# Altium PCB MasterBoardRevB.PcbDoc
Units mil, origin at the board's own origin, x right, y up, seen from the top; angles counter-clockwise.
Board outline 4074 x 3000 mil, 2 copper layers (Top Layer, Bottom Layer); 72 components, 53 nets, 273 pads, 61 vias.
Unrouted connection lines stored in the file: 1.
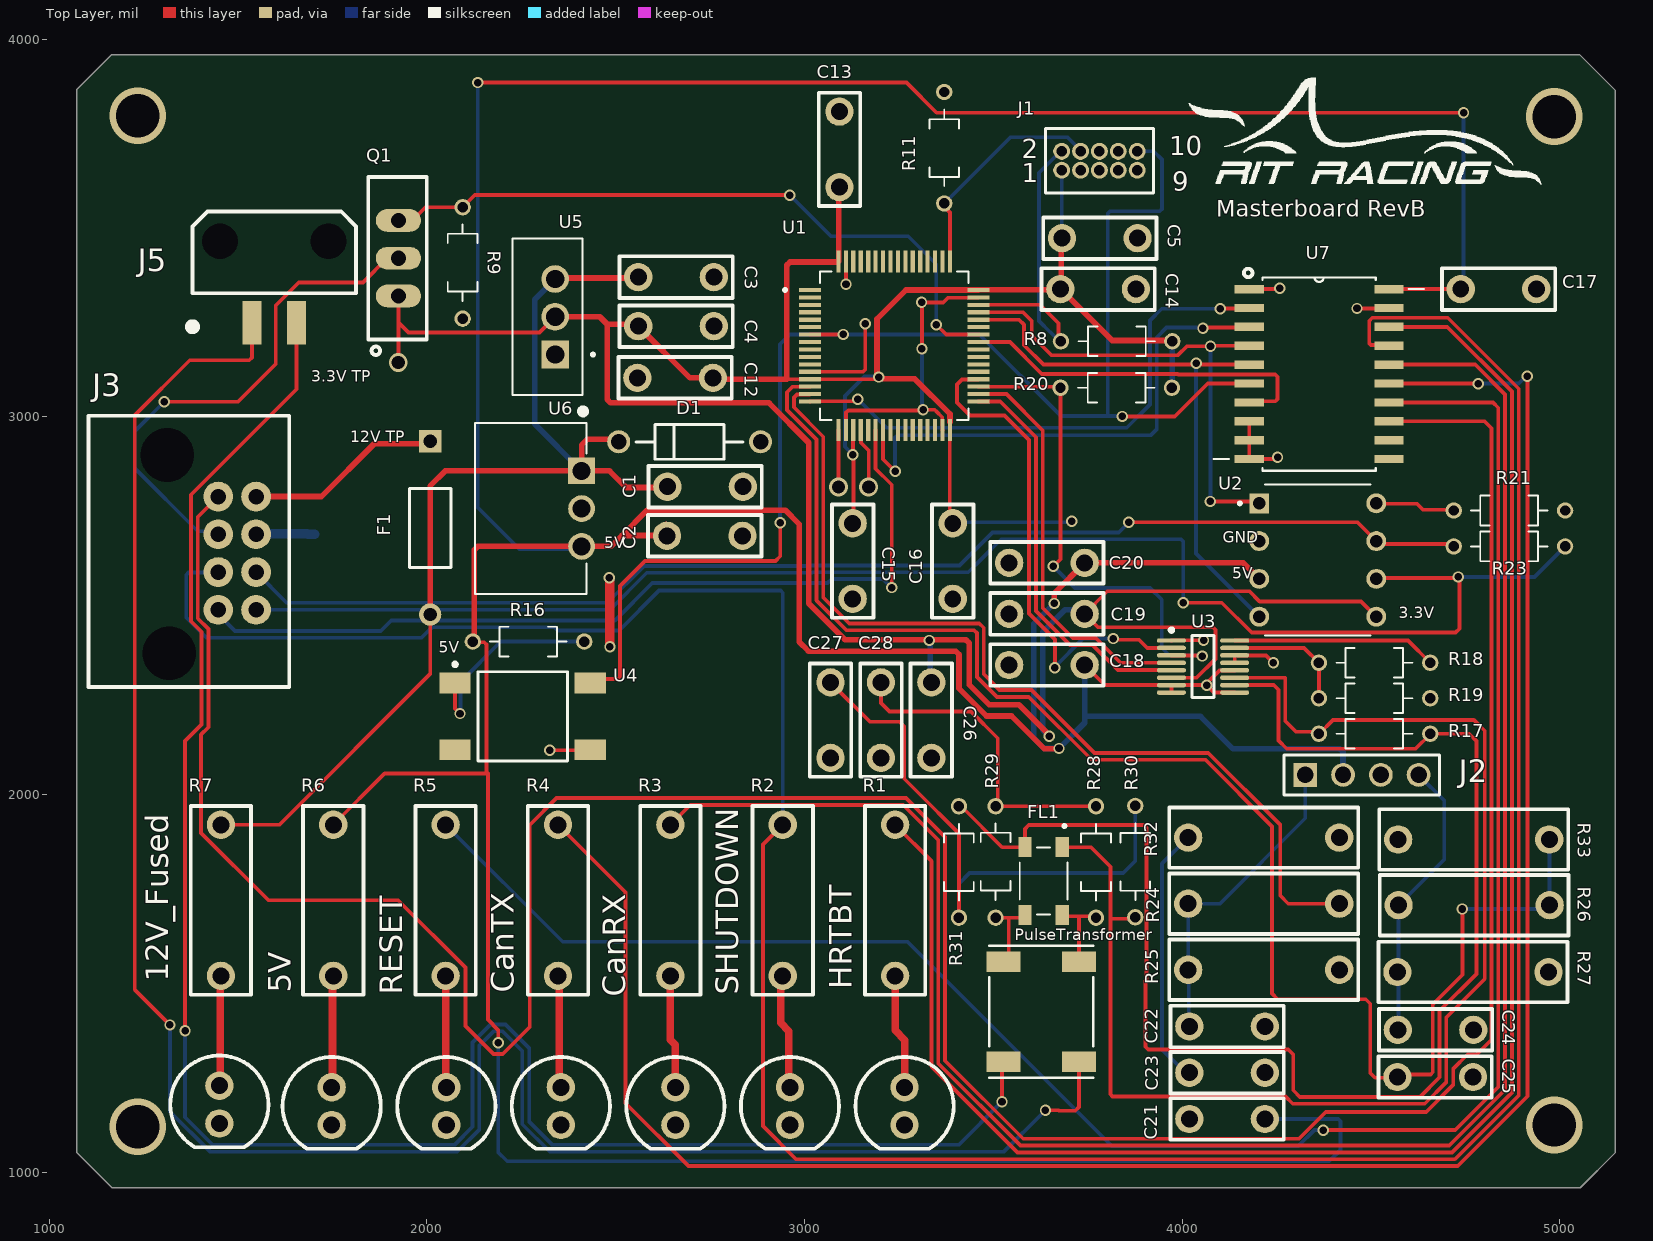
[diagram p0: Top Layer view]
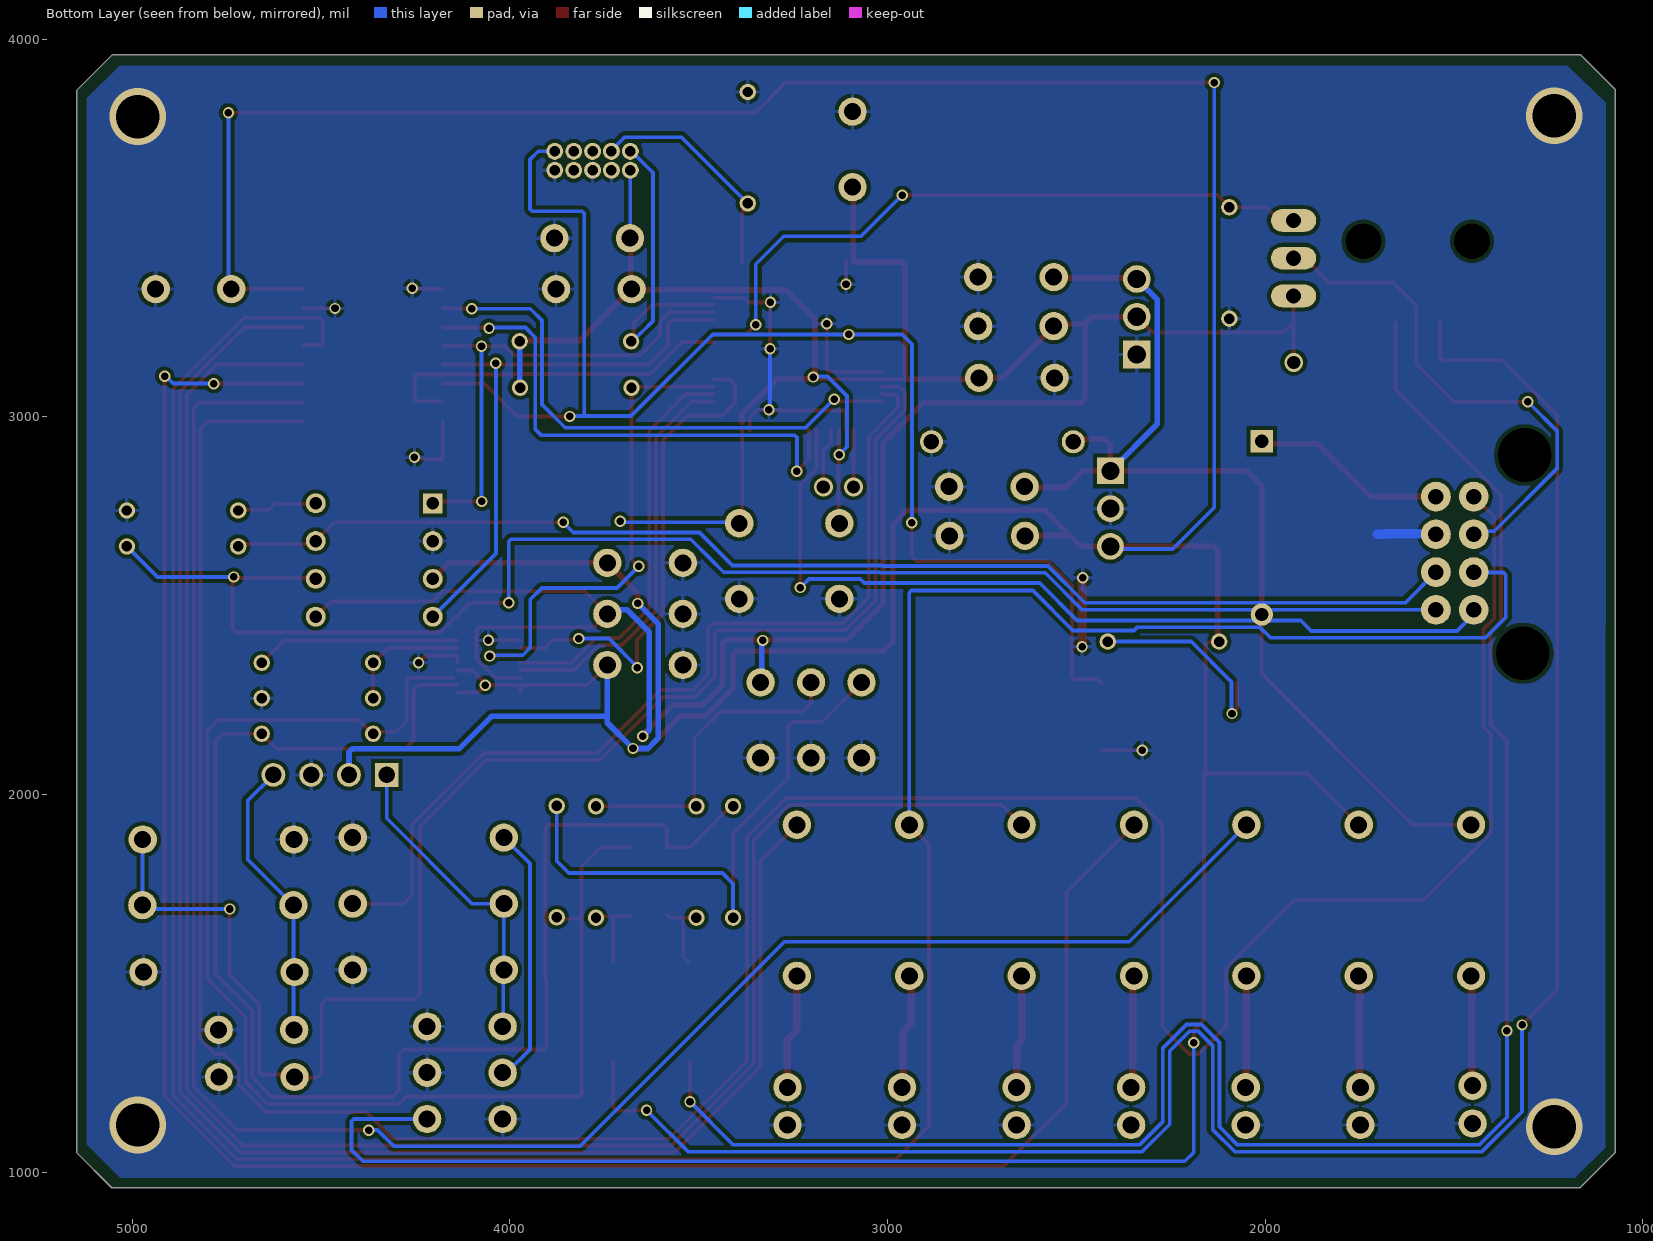
[diagram p1: Bottom Layer view, seen from below]

## Layer stack, top to bottom
Top Solder: solder mask 0.4, Solder Resist, Dk 3.5
Top Layer: signal copper 1.4
Dielectric 1: dielectric 12.6, FR-4, Dk 4.8
Bottom Layer: signal copper 1.4
Bottom Solder: solder mask 0.4, Solder Resist, Dk 3.5

## Board outline
1073,1053 1073,3866 1166,3959 5052,3959 5147,3864 5147,1052 5054,959 1167,959

## Design rules (kind name [scope] priority, off if disabled: settings)
Clearance [All] p1: gap=10 ignorepadtopadclearanceinfootprint=TRUE except(0: Arc-Hole Track-Hole SMDPad-Hole THPad-Hole Via-Hole Fill-Hole Poly-Hole Region-Hole Text-Hole; 8: Arc-Arc Arc-Track Arc-SMDPad Track-Track Track-SMDPad SMDPad-SMDPad)
PolygonConnect [All] p1: connectstyle=Relief reliefconductorwidth=10 reliefentries=4 polygonreliefangle="90 Angle" airgapwidth=10
RoomDefinition CONNECTORS [InComponentClass('CONNECTORS')] p1: confinementstyle=ConfineIn formatcopy=TRUE lockcomponents=FALSE outline 674,2061 4615,2061 4615,3940 674,3940
RoomDefinition POWER [InComponentClass('POWER')] p2: confinementstyle=ConfineIn formatcopy=TRUE lockcomponents=FALSE outline 3221.8,3659.96 3221.8,4102 3447.2,4102 3447.2,3280.86 4012.65,3280.86 4012.65,3142.72 3646.35,3142.72 3221.8,3142.72
RoomDefinition COMMUNICATIONS [InComponentClass('COMMUNICATIONS')] p3: confinementstyle=ConfineIn formatcopy=TRUE lockcomponents=FALSE outline 3477,1845 4844,1845 4844,2803 3477,2803
RoomDefinition PROCESSOR [InComponentClass('PROCESSOR')] p4: confinementstyle=ConfineIn formatcopy=TRUE lockcomponents=FALSE outline 2492.64,3033.23 2492.64,3173.23 2930.79,3173.23 2930.79,3461.22 3022.64,3461.22 3022.64,3873.23 3162.64,3873.23 3162.64,3461.22 3510.63,3461.22 3510.63,3408.23 5002.64,3408.23 5002.64,3268.23 4652.64,3268.23 4652.64,2844.23 3462.64,2844.23 3462.64,2453.23 3057.64,2453.23 3057.64,2915.24 2930.79,2915.24 2930.79,3033.23
RoutingVias [All] p1: holewidth=28 width=50 viastyle="Through Hole" minholewidth=28 minwidth=50 maxholewidth=28 maxwidth=50
SolderMaskExpansion [All] p1: expansion=4 istentingtop=FALSE
Width [All] p1: maxlimit=25 minlimit=8 preferedwidth=10 minimp=50.000000 maximp=50.000000 favimp=50.000000
30 further rules are at their usual default settings.

## Classes and differential pairs
component class CONNECTORS: C5 C21 C22 C23 C24 C25 J1 J2 J3 J5 Q1 R8 R9 R11 R16 R24 R25 R26 R27 R32 R33 U4
component class PROCESSOR: C12 C13 C14 C15 C16 C17 U1 U7
component class POWER: 5V 12V_Fused C1 C2 C3 C4 CanRX CanTX D1 F1 HRTBT R1 R2 R3 R4 R5 R6 R7 RESET SHUTDOWN U5 U6
component class COMMUNICATIONS: C18 C19 C20 C26 C27 C28 FL1 PulseTransformer R17 R18 R19 R20 R21 R23 R28 R29 R30 R31 U2 U3

## Components (designator, comment, footprint, x,y, rotation, side; value= is the part's Value field where it differs from the comment)
5V "Value?" "LED, TH" 1748.33,1175 r270 top
12V_Fused "Value?" "LED, TH" 1451,1179 r270 top
C1 "10uF" "Cap, 5mm TH, Ceramic" 2737,2815 r180 top value=Value?
C2 "10uF" "Cap, 5mm TH, Ceramic" 2736,2685 r180 top value=Value?
C3 "10uF" "Cap, 5mm TH, Ceramic" 2660,3370 r180 top value=Value?
C4 "10uF" "Cap, 5mm TH, Ceramic" 2660,3240 r180 top value=Value?
C5 "500nF" "Cap, 5mm TH, Ceramic" 3782,3473 r180 top value=Value?
C12 "100nF" "Cap, 5mm TH, Ceramic" 2657.64,3103.23 r0 top value=Value?
C13 "100nF" "Cap, 5mm TH, Ceramic" 3092.64,3708.23 r270 top value=Value?
C14 "100nF" "Cap, 5mm TH, Ceramic" 3777.64,3338.23 r180 top value=Value?
C15 "100nF" "Cap, 5mm TH, Ceramic" 3127.64,2618.23 r90 top value=Value?
C16 "100nF" "Cap, 5mm TH, Ceramic" 3392.64,2618.23 r90 top value=Value?
C17 "100nF" "Cap, 5mm TH, Ceramic" 4837.64,3338.23 r180 top value=Value?
C18 "100nF" "Cap, 5mm TH, Ceramic" 3642,2343 r0 top value=Value?
C19 "100nF" "Cap, 5mm TH, Ceramic" 3642,2478.25 r0 top value=Value?
C20 "100nF" "Cap, 5mm TH, Ceramic" 3642,2613.5 r0 top value=Value?
C21 "47uF" "Cap, 5mm TH, Ceramic" 4119,1141 r0 top value=Value?
C22 "47nF" "Cap, 5mm TH, Ceramic" 4119,1386 r180 top value=Value?
C23 "47nF" "Cap, 5mm TH, Ceramic" 4119,1263.5 r180 top value=Value?
C24 "47nF" "Cap, 5mm TH, Ceramic" 4671,1377 r0 top value=Value?
C25 "47nF" "Cap, 5mm TH, Ceramic" 4670,1252 r0 top value=Value?
C26 "100nF" "Cap, 5mm TH, Ceramic" 3336,2197 r90 top value=Value?
C27 "100nF" "Cap, 5mm TH, Ceramic" 3069,2197 r270 top value=Value?
C28 "10nF" "Cap, 5mm TH, Ceramic" 3202.5,2197 r270 top value=Value?
CanRX "Value?" "LED, TH" 2658.33,1175 r270 top
CanTX "Value?" "LED, TH" 2355,1175 r270 top
D1 "MUR180ERLG" ONSC-AXIAL_LEAD-2-59-10_P 2696,2934 r0 top
F1 "Fuse" PIN-W2/E2.8 2009,2706 r270 top
FL1 "ACT45B-220-2P-TL003" FIL_ACT45B-220-2P-TL003 3633,1771 r270 top
HRTBT "Value?" "LED, TH" 3265,1175 r270 top
J1 "SAMTEC-FTSH-105-01-X-D" SAMTEC-FTSH-105-01-X-D 3781,3678 r0 top
J2 "4pin Header" 61300411121 4476,2052 r0 top
J3 "30700-5080" 30700-5080 1498,2639 r90 top
J5 "43650-0209" 43650-0209 1596.3,3465 r180 top
PulseTransformer "PE-68386NLT" PE-68386NL_PUL 3627,1425 r270 top
Q1 "ZVN4424A" TO-220-KCS0003B_40MIL-DRILL 1925,3420 r90 top
R1 "Value?" "Resistor, TH" 3240,1720 r90 top
R2 "Value?" "Resistor, TH" 2942.5,1720 r90 top
R3 "Value?" "Resistor, TH" 2645,1720 r90 top
R4 "Value?" "Resistor, TH" 2347.5,1720 r90 top
R5 "Value?" "Resistor, TH" 2050,1720 r90 top
R6 "Value?" "Resistor, TH" 1752.5,1720 r90 top
R7 "Value?" "Resistor, TH" 1455,1720 r90 top
R8 "100k" "RESAD640W45L370D200 - duplicate" 3824,3200 r0 top value=Value?
R9 "10k" "RESAD640W45L370D200 - duplicate" 2095,3405 r90 top value=Value?
R11 "100k" "RESAD640W45L370D200 - duplicate" 3370,3715 r270 top value=Value?
R16 "160r" "RESAD640W45L370D200 - duplicate" 2272,2405 r180 top value=Value?
R17 "120r" "RESAD640W45L370D200 - duplicate" 4512,2161 r180 top value=Value?
R18 "806r" "RESAD640W45L370D200 - duplicate" 4512,2349 r180 top value=Value?
R19 "1.21k 5%" "RESAD640W45L370D200 - duplicate" 4512,2255 r180 top value=Value?
R20 "2k" "RESAD640W45L370D200 - duplicate" 3823,3077 r0 top value=Value?
R21 "10k" "RESAD640W45L370D200 - duplicate" 4869,2752 r180 top value=Value?
R23 "120r" "RESAD640W45L370D200 - duplicate" 4869,2657 r180 top value=Value?
R24 "160r" "Resistor, TH" 4216,1711 r180 top value=Value?
R25 "12K" "Resistor, TH" 4216,1536 r0 top value=Value?
R26 "160r" "Resistor, TH" 4773,1707 r180 top value=Value?
R27 "12K" "Resistor, TH" 4770,1530 r180 top value=Value?
R28 "300r" "RESAD640W45L370D200 - duplicate" 3772,1824 r270 top value=Value?
R29 "300r" "RESAD640W45L370D200 - duplicate" 3506,1819 r90 top value=Value?
R30 "62r" "RESAD640W45L370D200 - duplicate" 3876,1825 r270 top value=Value?
R31 "62r" "RESAD640W45L370D200 - duplicate" 3409,1824 r270 top value=Value?
R32 "309r" "Resistor, TH" 4216,1886 r0 top value=Value?
R33 "309r" "Resistor, TH" 4772,1881 r0 top value=Value?
RESET "Value?" "LED, TH" 2051.67,1175 r270 top
SHUTDOWN "Value?" "LED, TH" 2961.67,1175 r270 top
U1 "STM32F091RCT6" *QFP50P1200X1200X160-64N 3237.64,3188.23 r0 top
U2 "MCP2562-E/P" DIP787W45P254L1016H533Q8 4359,2621 r0 top
U3 "LTC6820IMS#TRPBF" LT-MS-16_M 4055.34,2338.9 r0 top
U4 "Reset Button" TECO-FSM4JSMA_V 2254,2207 r90 top
U5 "LM1117T-3.3" TO254P1054X470X1955-3 2340,3265 r90 top
U6 "VXO7805-1000" CONV_VXO7805-1000 2410,2857 r270 top
U7 "74ACT541SC" SOIC127P1032X265-20N 4362.64,3113.23 r0 top

## Footprints (in the part's own frame and the unit in brackets; to place one, negate y for a bottom-side part, rotate by r counter-clockwise, add the part's x,y. Pads: shape width x height; smd on the part's side, far side on the other; paste and mask are expansions set on the pad)
30700-5080 [mm]
  round 2 hole 1.04: 1(3.81,-1.27) 2(1.27,-1.27) 3(-1.27,-1.27) 4(-3.81,-1.27) 5(3.81,1.27) 6(1.27,1.27) 7(-1.27,1.27) 8(-3.81,1.27)
  round 0 hole 3.6 unplated: ""(-6.731,4.572)
  round 3 hole 3.6 unplated: ""(6.604,4.699)
  silkscreen extent -9,-3.5 9.25,10, body extent -9.1,-9.96 9.05,8.84, height 22.04
43650-0209 [mm] "Molex 2 Position Board Header, Right Angle"
  rect 1.27x2.92 smd: 1(1.5,5.47) 2(-1.5,5.47)
  round 0 hole 2.41 unplated: ""(-3.65,0) ""(3.65,0)
  silkscreen extent -5.5,-2 5.7,5.95, body extent -4.82,-4.6 4.83,6.14, height 5.64
61300411121 [mm]
  rect 1.6x1.6 hole 1.1: 1(-3.81,0)
  round 1.6 hole 1.1: 2(-1.27,0) 3(1.27,0) 4(3.81,0)
  silkscreen extent -5.23,-1.35 5.23,1.35, body extent -5.08,-1.27 5.08,1.27, height 8.57
*QFP50P1200X1200X160-64N [mm]
  rect 1.47x0.28 smd: 1(-5.67,3.75) 2(-5.67,3.25) 3(-5.67,2.75) 4(-5.67,2.25) 5(-5.67,1.75) 6(-5.67,1.25) 7(-5.67,0.75) 8(-5.67,0.25) 9(-5.67,-0.25) 10(-5.67,-0.75) 11(-5.67,-1.25) 12(-5.67,-1.75) 13(-5.67,-2.25) 14(-5.67,-2.75) 15(-5.67,-3.25) 16(-5.67,-3.75) 33(5.67,-3.75) 34(5.67,-3.25) 35(5.67,-2.75) 36(5.67,-2.25) 37(5.67,-1.75) 38(5.67,-1.25) 39(5.67,-0.75) 40(5.67,-0.25) 41(5.67,0.25) 42(5.67,0.75) 43(5.67,1.25) 44(5.67,1.75) 45(5.67,2.25) 46(5.67,2.75) 47(5.67,3.25) 48(5.67,3.75)
  rect 0.28x1.47 smd: 17(-3.75,-5.67) 18(-3.25,-5.67) 19(-2.75,-5.67) 20(-2.25,-5.67) 21(-1.75,-5.67) 22(-1.25,-5.67) 23(-0.75,-5.67) 24(-0.25,-5.67) 25(0.25,-5.67) 26(0.75,-5.67) 27(1.25,-5.67) 28(1.75,-5.67) 29(2.25,-5.67) 30(2.75,-5.67) 31(3.25,-5.67) 32(3.75,-5.67) 49(3.75,5.67) 50(3.25,5.67) 51(2.75,5.67) 52(2.25,5.67) 53(1.75,5.67) 54(1.25,5.67) 55(0.75,5.67) 56(0.25,5.67) 57(-0.25,5.67) 58(-0.75,5.67) 59(-1.25,5.67) 60(-1.75,5.67) 61(-2.25,5.67) 62(-2.75,5.67) 63(-3.25,5.67) 64(-3.75,5.67)
  silkscreen extent -7.44,-5 5,5, body extent -6,-6 6,6, height 1.56
"Cap, 5mm TH, Ceramic" [mil] "Through Hole Cap, Ceramic"
  round 75 hole 45: 1(-100,0) 2(100,0)
  silkscreen extent -150,-55 150,55, body extent -109,-59 109,59, height 176
CONV_VXO7805-1000 [mm]
  rect 1.8x1.8 hole 1.2: 1(0,0)
  round 1.8 hole 1.2: 2(2.54,0) 3(5.08,0)
  silkscreen extent -4.2,-7.18 8.29,0.32, body extent -3.12,-6.76 8.38,0.32, height 17.5
DIP787W45P254L1016H533Q8 [mil]
  rect 52.68x52.68 hole 32.68: 1(-155,150)
  round 52.68 hole 32.68: 2(-155,50) 3(-155,-50) 4(-155,-150) 5(155,-150) 6(155,-50) 7(155,50) 8(155,150)
  silkscreen extent -210,-200 140,200, body extent -155,-185 155,180, height 218
FIL_ACT45B-220-2P-TL003 [mm]
  rect 1.35x0.9 smd: 1(-2.275,1.25) 2(-2.275,-1.25) 3(2.275,-1.25) 4(2.275,1.25)
  silkscreen extent -3.8,-1.6 2.25,1.6
"LED, TH" [mil] "Through Hole LED"
  round 75 hole 45: 1(-50,0) 2(50,0)
  silkscreen extent -130,-130 113,130, body extent -118,-118 98,118, height 346
LT-MS-16_M [mm]
  oval 1.95x0.3 smd: 1(-2.125,1.75) 2(-2.125,1.25) 3(-2.125,0.75) 4(-2.125,0.25) 5(-2.125,-0.25) 6(-2.125,-0.75) 7(-2.125,-1.25) 8(-2.125,-1.75) 9(2.125,-1.75) 10(2.125,-1.25) 11(2.125,-0.75) 12(2.125,-0.25) 13(2.125,0.25) 14(2.125,0.75) 15(2.125,1.25) 16(2.125,1.75)
  silkscreen extent -2.25,-2.08 0.75,2.57, body extent -1.55,-2.05 1.55,2.05, height 1.1
ONSC-AXIAL_LEAD-2-59-10_P [mm] "AXIAL, 2-Leads, Diameter 2.35mm"
  round 1.55 hole 1.05: 1(-4.77,0) 2(4.77,0)
  silkscreen extent -3.59,-1.17 3.59,1.17
PE-68386NL_PUL [mil]
  rect 55x90 smd: 1(-132.5,100) 2(-132.5,-100) 3(132.5,-100) 4(132.5,100)
  silkscreen extent -175,-138 175,138, body extent 0,0 10,10, height 10
PIN-W2/E2.8 [mm] "Thru-Hole; 2 Leads"
  rect 1.5x1.5 hole 0.9: 1(-5.825,0)
  round 1.5 hole 0.9: 2(5.825,0)
  silkscreen extent -2.65,-1.4 2.65,1.4
"RESAD640W45L370D200 - duplicate" [mm]
  round 1.1 hole 0.7: 1(-3.683,0) 2(3.81,0)
  silkscreen extent -2.5,-1 2.65,1, body extent -3.92,-1.12 3.98,1.03, height 2.17
"Resistor, TH" [mil] "Axial Through Hole Resistor"
  round 75 hole 45: 1(-200,0) 2(200,0)
  silkscreen extent -250,-80 250,80, body extent -211,-51 211,51, height 106
SAMTEC-FTSH-105-01-X-D [mil]
  round 45 hole 27.95: 1(-100,-25) 2(-100,25) 3(-50,-25) 4(-50,25) 5(0,-25) 6(0,25) 7(50,-25) 8(50,25) 9(100,-25) 10(100,25)
  silkscreen extent -143,-85 143,85, body extent -125,-67 125,68, height 219
SOIC127P1032X265-20N [mil]
  rect 78x22 smd: 1(-185,225) 2(-185,175) 3(-185,125) 4(-185,75) 5(-185,25) 6(-185,-25) 7(-185,-75) 8(-185,-125) 9(-185,-175) 10(-185,-225) 11(185,-225) 12(185,-175) 13(185,-125) 14(185,-75) 15(185,-25) 16(185,25) 17(185,75) 18(185,125) 19(185,175) 20(185,225)
  silkscreen extent -279,-256 277,256
TECO-FSM4JSMA_V [mm] "SMD, 4-Leads, Body 6x6mm, Pitch 4.5mm"
  rect 1.4x2.1 smd: 1(2.25,4.55) 2(2.25,-4.55) 3(-2.25,4.55) 4(-2.25,-4.55)
  silkscreen extent -3,-3 3.62,4.67, body extent -3,-5 3,5, height 5.08
TO254P1054X470X1955-3 [mm]
  rect 1.86x1.86 hole 1.24: 1(-2.54,0)
  round 1.86 hole 1.24: 2(0,0) 3(2.54,0)
  silkscreen extent -5.27,-2.64 5.27,2.86
TO-220-KCS0003B_40MIL-DRILL [mil]
  oval 60x120 hole 40: 1(-100,0) 2(0,0) 3(100,0)
  silkscreen extent -256,-75 215,80, body extent -206,-85 200,45, height 749

## Part data
5V 12V_Fused CanRX CanTX HRTBT RESET SHUTDOWN: library part "LED, TH", "LED, 5mm, TH", Published=22Oct2016, Publisher=T.Tallo, Status=Active, TargetLibrary=RITRacing-LED's
C1 C2 C3 C4 C5 C12 C13 C14 C15 C16 C17 C18 C19 C20 C21 C22 C23 C24 C25 C26 C27 C28: library part "Cap, 5MM TH, Ceramic", "Generic Cap, 5MM TH, Ceramic", Published=22Oct2016, Publisher=T.Tallo, Status=Active, TargetLibrary=RITRacing-Passives
D1: library part CMP-0902-00111-1, "SWITCHMODE(TM) Power Rectifier, Ultrafast 'E' Series with High Reverse Energy Capability, 2-Pin Axial_Lead, Pb-Free, Tape and Reel", Manufacturer="On Semiconductor", ComponentLink1Description="Manufacturer URL", ComponentLink1URL=http://www.onsemi.com/, ComponentLink2Description=Datasheet, ComponentLink2URL=http://www.onsemi.cn/pub_link/Collateral/MUR180E-D.PDF, ComponentLink3Description="Package Specification", ComponentLink3URL=http://www.onsemi.cn/pub_link/Collateral/59-10.PDF, DatasheetVersion="Rev. 4", IFSM Max (A)=35, Mounting Technology="Through Hole", PackageDescription="2-Pin, Axial Lead, Diameter 2.35 mm", PackageReference=AXIAL_LEAD-2-59-10, PackageVersion="Rev. U, 02/2005", Packing="Tape and Reel", PartNumber=MUR180ERLG, RoHS=TRUE, Type=Ultrafast
F1: library part "Fuse 2", LatestRevisionDate=17-Jul-2002, LatestRevisionNote="Re-released for DXP Platform.", PackageDescription="Thru-Hole; 2 Leads", PackageReference=PIN-W2/E2.8, Published=8-Jun-2000, Publisher="Altium Limited"
FL1: "100ÂµH @ 100kHz 2 Line Common Mode Choke Surface Mount 5.8 kOhms @ 10MHz 150mA DCR 2Ohm", Package=None, Availability=Unavailable, MP=ACT45B-220-2P-TL003, Price=None
J1: "Connector Header Through Hole 10 position 0.050\" _1.27mm_", Package=None, Availability=Unavailable, MF=Samtec, MP=FTSH-105-01-F-D, Price=None, SnapEDA_Link=https://www.snapeda.com/parts/FTSH-105-01-F-D/Samtec%20Inc./view-part/105348/?ref=snap
J2: library part CMP-1502-01064-1, "THT Vertical Pin Header WR-PHD, Pitch 2.54 mm, Single Row, 4 pins", Contact Resistance=20mOhm, Manufacturer="Wurth Elektronik", Manufacturer Part Number=61300411121, Operating Temperature=-40to105degC, Rated Current=3A, Withstanding Voltage=500VAC, Working Voltage=250VAC, Datasheet URL=https://katalog.we-online.de/em/datasheet/6130xx11121.pdf, Gender=Male, Manufacturer URL=http://www.we-online.de, Mounting Technology=THT, Orientation=Vertical, Package Reference=61300411121, Packaging=Bag, Part Number=61300411121, Pin Number=4, Pitch=2.54mm, Publisher=WurthElektronik, Row Number=Single
J3: "Molex 8 Position High Density Board Header", Manufacturer=Molex, ComponentLink1Description=Datasheet, ComponentLink1URL=http://www.molex.com/molex/products/datasheet.jsp?part=active/0307004081_PCB_HEADERS.xml, PartNumber=30700-5080, Published=22Oct2016, Publisher=T.Tallo, Status=Active, TargetLibrary=RITRacing-Connectors
J5: "M3", Manufacturer=Molex, Voltage=600V, ComponentLink1Description=Datasheet, ComponentLink1URL=http://www.mouser.com/ds/2/418/NG_CD_1445088_A1-614413.pdf, PartNumber=43650-0209, Published=13Aug2018, Publisher=T.Tallo, Status=Active, TargetLibrary=RITRacing-Connectors
PulseTransformer: "No Description Available", Built_By=EMA_Cory, Copyright="Copyright (C) 2018 Accelerated Designs. All rights reserved", Manufacturer_Part_Number=PE-68386NLT, RefDes=RefDes, SourceLibrary=Pulse_Electronics_2019-12-18, Type=DEV, Vendor="Pulse Electronics Corporation"
Q1: "N-Channel MOSFET, 240V, 260mA", Manufacturer="Diodes Inc", ComponentLink1Description=Datasheet, ComponentLink1URL=https://www.diodes.com/assets/Datasheets/ZVN4424A.pdf, PartNumber=ZVN4424A, Published=09/27/2017, Publisher=T.Tallo, Status=Active, TargetLibrary=RITRacing-Transistors
R1 R2 R3 R4 R5 R6 R7 R8 R9 R11 R16 R17 R18 R19 R20 R21 R23 R24 R25 R26 R27 R28 R29 R30 R31 R32 R33: library part "Resistor, TH", "Generic TH Resistor", Published=22Oct2016, Publisher=T.Tallo, Status=Active, TargetLibrary=RITRacing-Passives
U1: library part CMP-12105-000069-1, "IC MCU 32BIT 256KB FLASH 64LQFP", Ambient Temperature Range High=+85°C, Ambient Temperature Range Low=-40°C, Frequency=48MHz, Manufacturer=STMicroelectronics, Max Junction Temp=+105°C, Max Supply Voltage=3.6V, Min Supply Voltage=2V, Nominal Supply Current=0.9-26.9mA, Package=LQFP64-5W, Temperature="-40°C to +85°C", Automotive=No, Category=IC, ComponentLink2Description=Datasheet, ComponentLink2URL=https://www.st.com/resource/en/datasheet/stm32f091rc.pdf, Core Architecture="ARM Cortex-M0", Data Bus Width=32bits, Device Class L1="Integrated Circuits (ICs)", Device Class L2="Embedded Processors and Controllers", Device Class L3=Microcontrollers, Digikey Description="IC MCU 32BIT 256KB FLASH 64LQFP", Height=1.6mm, Interface=I2C,SPI,USART,CAN,LIN,IrDA,I2S,SMBus, Ipc Land Pattern Name=QFP50P1200X1200X160-64, Lead Free=Yes, Manufacturer Part Number=STM32F091RCT6, Memory Size=256KBytes, Memory Type=FLASH, Mouser Description="ARM Microcontrollers - MCU 16/32-BITS MICROS", Number Of A/D Converters=1, Number Of Adc Channels=19, Number Of Cores=1, Number Of I2C Channels=2, Number Of I/Os=52, Number Of Pwm Channels=6, Number Of Spi Channels=2, Number Of Timers/Counters=10, Number Of Uart Channels=8, Octopart=https://octopart.com/stm32f091rct6-stmicroelectronics-51988683, Ram Size=32KBytes, RoHS=TRUE, Standoff Height=0.05mm, Temperature Range High=+85°C, Temperature Range Low=-40°C
U2: "1/1 Transceiver Half CANbus 8-PDIP", Package="DIP-8 Microchip", Digi-Key_Part_Number=MCP2562-E/P-ND, DigiKey-Purchase-URL=https://snapeda.com/shop?store=DigiKey&id=290285, MF=Microchip, MP=MCP2562-E/P, SnapEDA_Link=https://www.snapeda.com/parts/MCP2562-E/P/Microchip/view-part/290285/?ref=snap
U3: library part CMP-0937-00011-1, "IsoSPI Isolated Communication Interface, 2.7 to 5.5 V, -40 to 85 degC, 16-Pin MSOP (MS), Pb-Free, Tape and Reel", IO Supply Current="1 uA Max.", IO Supply Voltage Range="1.7 to 5.5 V", Manufacturer="Linear Technology", Power Supply="2.7 to 5.5 V", Receiver Input Resistance="35 kOhm", Supply Current, IDLE State="2 uA", Temperature Range (degC)="-40 to 85", ComponentLink1Description="Manufacturer URL", ComponentLink1URL=http://www.linear.com/, ComponentLink2Description=Datasheet, ComponentLink2URL=http://cds.linear.com/docs/en/datasheet/6820fa.pdf, ComponentLink3Description="Package Specification", ComponentLink3URL=http://cds.linear.com/docs/en/packaging/05081669_A_MS16.pdf, DatasheetVersion="Rev. A", Manufacturer Part Number=LTC6820IMS#TRPBF, Mounting Technology="Surface Mount", PackageDescription="16-Pin Micro Small Outline Package, Body 4.039 x 3 mm, Pitch 0.5 mm", PackageReference=MS-16, PackageVersion="Rev. A", Packing="Tape and Reel", PartNumber=LTC6820IMS#TRPBF, VBIAS="1.9 to 2.1 V"
U4: library part CMP-2000-07488-1, "Swicth, SPST, 24 V, -35 to 85 degC, 4-Pin SMD, RoHS, Tape and Reel", Case\/Package=SMD/SMT, Contact Current Rating=50mA, Contact Resistance=100mOhm, Manufacturer="TE Connectivity", Max Operating Temperature=85degC, Max Voltage Rating (DC)=12V, Min Operating Temperature=-35degC, Operating Force=1.57N, Package Description="4-Pin Surface Mount Device, Body 6 x 6 mm, Pitch 4.5 mm", Package Quantity=750, Package Reference=FSM4JSMA, Voltage Rating=24V, Actuator Length=0.055inch, Actuator Material=Polyamide, Contact Material=CopperAlloy, Contact Plating=Silver, Current Rating=50mA, Datasheet URL=http://www.te.com/commerce/DocumentDelivery/DDEController?Action=showdoc&DocId=Customer+Drawing%7F2-1437565-7%7FV%7Fpdf%7FEnglish%7FENG_CD_2-1437565-7_V.pdf%7F4-1437565-2, Datasheet Version="Rev. V, 02/2015", Electrical Life=100000Cycles, Illumination Type=Illuminated, Length=6mm, Manufacturer URL=http://www.te.com/, Mechanical Life=100000Cycles, Mount=SurfaceMount, Mounting Technology=SurfaceMount, Orientation=Straight, Packaging=LoosePiece, REACH SVHC=Unknown, RoHSCompliant=true, Switch Travel=0.25mm, Termination=GullWing, Throw Configuration=SPST, Voltage Rating (DC)=24V, Width=6mm
U5: "800-mA 15-V linear voltage regulator 3-TO-220 0 to 125", Package="TO-220-3 Texas Instruments", Arrow_Electronics-Purchase-URL=https://snapeda.com/shop?store=Arrow+Electronics&id=22275, Availability=https://www.mouser.com/ProductDetail/Texas-Instruments/LM1117T-33-NOPB?qs=X1J7HmVL2ZF7RIQB6O0mNg%3D%3D&gclid=Cj0KCQjwvvj5BRDkARIsAGD9vlJnD1MNOYBTPv7FHDAskkwDQ_PuLBSV-edvQAne3qvGjGEuZX3qJSwaAtIgEALw_wcB, DigiKey-Purchase-URL=https://snapeda.com/shop?store=DigiKey&id=22275, MF="Texas Instruments", Mouser-Purchase-URL=https://snapeda.com/shop?store=Mouser&id=22275, MP=LM1117T-3.3/NOPB, Price=None, SnapEDA_Link=https://www.snapeda.com/parts/LM1117T-3.3/NOPB/Texas%20Instruments/view-part/22275/?ref=snap, Texas_Instruments-Purchase-URL=https://snapeda.com/shop?store=Texas+Instruments&id=22275
U7: "Buffer, Non-Inverting 1 Element 8 Bit per Element 3-State Output 20-SOIC", Package="SOIC-20 Fairchild Semiconductor", Arrow_Electronics-Purchase-URL=https://snapeda.com/shop?store=Arrow+Electronics&id=431052, Availability=Warning, DigiKey-Purchase-URL=https://snapeda.com/shop?store=DigiKey&id=431052, MF="ON Semiconductor", Mouser-Purchase-URL=https://snapeda.com/shop?store=Mouser&id=431052, MP=74ACT541SC, Price=None, SnapEDA_Link=https://www.snapeda.com/parts/74ACT541SC/ON%20Semiconductor/view-part/431052/?ref=snap

## Via types
v1: diameter 30, hole 20, Top Layer to Bottom Layer, 54 vias
v2: diameter 150, hole 115, Top Layer to Bottom Layer, 4 vias
v3: diameter 50, hole 35, Top Layer to Bottom Layer, 3 vias

## Nets (pads, with @x,y where several pads share a name; then routed paths per layer and width w, separated by ;. In a path a pad name is that pad's centre, name@x,y a point inside that pad or via, vN(x,y) a via of type N, cw(c..) or ccw(c..) an arc to the next point about the centre after c; other vN are vias at no path point)
12V_Fused: C1.2 C3.2 D1.1 F1.2 R7.2 U5.3 U6.1 | length 2860.5
  Top Layer w10: R7.2 1610,1920 2009,2319 F1.2
  Top Layer w15: F1.2 2009,2817 2049,2857 U6.1 ; U5.3 2342.5,3367.5 2557.5,3367.5 C3.2 ; D1.1 2501.2,2941 2426,2941 2410,2925 U6.1 ; C1.2 2635,2813 2528,2813 2484,2857 U6.1
  Bottom Layer w15: U5.3 2285.89,3310.89 2285.89,2981.11 U6.1
AIR_Open_Sig: J3.6 Q1.2 | length 1370.2
  Top Layer w10: v1(1305,3040) 1500,3040 1600,3140 1600,3295.16 1660.86,3356.02 1831.02,3356.02 1895,3420 Q1.2
  Bottom Layer w10: v1(1305,3040) 1227.13,2962.13 1227.13,2863.43 1393.63,2696.94 1440.06,2696.94 J3.6
AIRS_Signal_NMOS: Q1.3 R9.2 U1.42 | length 1810.3
  Top Layer w10: Q1.3 1961.39,3520 1996.39,3555 R9.2 2127,3587 v1(2961,3587) ; v1(3349,3244) 3375.24,3217.76 U1.42
  Bottom Layer w10: v1(2961,3587) 3070,3478 3275,3478 3349,3404 v1(3349,3244)
CANH: J3.3 R23.2 U2.7 | length 3319.3
  Top Layer w10: v1(3859,2721) 4464,2721 4521.63,2663.37 4712.63,2663.37 R23.2
  Bottom Layer w10: J3.3 1629,2508 2478,2508 2575,2605 3012.82,2605 3014.54,2606.73 3410.73,2606.73 3498,2694 3832,2694 v1(3859,2721)
CANL: J3.4 R23.1 U2.6 | length 4140.9
  Top Layer w10: v1(4003,2508) 4105,2508 4184.34,2428.66 4723.66,2428.66 4734,2439 4734,2573.14 4728.14,2579 4722.18,2573.04 U2.6@4518.04,2573.04 ; U2.6@4511,2570 U2.6@4514.04,2573.04
  Bottom Layer w10: J3.4 2484.46,2489 2582.46,2587 3020.27,2587 3022,2588.73 3382.23,2588.73 3433.73,2588.73 3470.14,2625.14 3521,2676 3997.14,2676 4003,2670.14 v1(4003,2508) ; v1(4731.07,2576.07) 4933.07,2576.07 R23.1
CanRx: U1.45 U2.1 U7.4 | length 1340
  Top Layer w10: U1.45 3461.06,3277 3578.39,3277 3601.85,3253.54 3601.85,3215 3653.5,3163.35 3989.18,3163.35 4012.84,3187 4066.41,3187 4067.64,3188.23 U7.4 ; v1@4077,2779 4080,2776 4199,2776 U2.1@4205,2770
  Bottom Layer w10: v1(4074,2776) 4075,2777 v1(4075,3187)
CanRx_FromBuff: R3.2 U7.16 | length 5194.5
  Top Layer w10: R3.2 2697.5,1972.5 3261.75,1972.5 3354.35,1879.9 3354.35,1287.77 3571.62,1070.5 4707.13,1070.5 4855,1218.37 4855,3059.43 4776.2,3138.23 U7.16
CanTx: U1.44 U2.4 U7.5 | length 1541.4
  Top Layer w10: U1.44 3568.17,3257.13 3581.2,3244.1 3581.2,3189.7 3632.67,3138.23 4033,3138.23 v1(4037,3142.23) ; v1@4037,3138.23 U7.5
  Bottom Layer w10: v1(4037,3142.23) 4037,2638 U2.4@4205,2470
CanTx_FromBuff: R4.2 U7.15 | length 5625.8
  Top Layer w10: R4.2 2526.26,1741.24 2526.26,1182.82 2692.59,1016.5 4729.5,1016.5 4914,1201 v1(4914,3107.82) ; U7.15 4783.77,3088.23 v1(4784,3088)
  Bottom Layer w10: v1(4784,3088) 4891.4,3088 4911.22,3107.82 v1(4914,3107.82)
CHANNEL1: C25.1 R26.1 R33.2 U1.14 | length 4120.1
  Top Layer w10: U1.14 2969,3079.96 2953.99,3064.95 2953.99,3018 3032,2939.99 3032,2514.16 3111.16,2435 3449.14,2435 3456.5,2427.64 3456.5,2311.5 3509.5,2258.5 3594.04,2258.5 3760.54,2092 4061.54,2092 4238,1915.54 4238,1473 4253,1458 4486,1458 4498,1446 4498,1263 4511,1250 4568,1250 C25.1 4576.73,1258.73 4657.41,1258.73 4663.27,1264.59 4663.27,1444.27 4742,1523 v1(4742,1697)
  Bottom Layer w10: C25.1@4580,1244 C25.1@4580,1244.41 ; v1(4742,1697) 4963,1697 R26.1 4972.5,1707.5 4972.5,1880.5 R33.2
CHANNEL2: C23.2 R24.1 R32.1 U1.15 | length 3178.1
  Top Layer w10: U1.15 3013.24,3059.1 2980.09,3059.1 2971.99,3051.01 2971.99,3025.45 3050,2947.45 3050,2521.62 3118.62,2453 3463,2453 3474.5,2441.5 3474.5,2318.96 3516.46,2277 3601,2277 3768,2110 4069,2110 4260,1919 4260,1732 4281,1711 R24.1
  Bottom Layer w10: R32.1 3947,1817 3947,1325 4008.5,1263.5 C23.2
ChargeSignal_FromBuff: J3.5 U7.13 | length 8028.9
  Top Layer w10: J3.5 1393.63,2734.63 1393.63,2466.48 1421.87,2438.24 1421.87,2177.93 1402.5,2158.57 1402.5,1898.25 1580.75,1720 1924.25,1720 2102.5,1541.75 2102.5,1387.07 2176.57,1313 2201.43,1313 2272.59,1384.16 2272.59,1919.34 2343.75,1990.5 3269.2,1990.5 3372.35,1887.36 3372.35,1295.23 3579.07,1088.5 4309.07,1088.5 4380.35,1159.77 4646.23,1159.77 4717.5,1231.04 4717.5,1273.75 4756,1312.25 4780.5,1312.25 4819,1350.75 4819,2969.95 4800.72,2988.23 U7.13
ChargeSignalCMD: U1.41 U7.7 | length 967.7
  Top Layer w10: U1.41 3460.94,3198 3543.87,3198 3628.22,3113.65 3988.18,3113.65 3990.04,3111.8 4132.82,3111.8 4133.25,3112.23 4246.35,3112.23 4252.64,3105.94 4252.64,3047.19 4246.78,3041.33 4180.74,3041.33 U7.7
Charging: J3.8 U1.22 | length 2314.3
  Top Layer w10: U1.22 3188.43,2862.57 3231,2820 v1(3231,2548)
  Bottom Layer w10: J3.8 1448,2477 1492,2433 1878,2433 1906,2461 2498,2461 2597,2560 3061.33,2560 3072.06,2570.73 3208.27,2570.73 v1(3231,2548)
GND: 5V.2 12V_Fused.2 C1.1 C2.1 C3.1 C4.1 C5.1 C12.1 C13.1 C14.1 C15.1 C16.1 C17.1 C18.1 C19.1 C20.1 C21.1 C22.1 C23.1 C24.2 C25.2 C26.1 C27.2 C28.2 CanRX.2 CanTX.2 D1.2 HRTBT.2 J1.3 J1.5 J1.9 J2.3 J3.2 R9.1 R11.1 R19.1 R21.1 R25.2 R27.1 R32.2 R33.1 RESET.2 SHUTDOWN.2 U1.12 U1.18 U1.31 U1.47 U1.63 U2.2 U3.1 U3.13 U3.14 U4.4 U5.1 U6.2 U7.1 U7.8 U7.9 U7.10 U7.19 | length 2159.4
  Top Layer w10: v1(2326,2117) 2431.72,2117 U4.4 ; U1.12 3155.14,3119.33 3161,3125.19 v1(3161,3246.73) ; U1.18 3110.2,2965.51 3110.2,3011.14 3116.05,3017 3312,3017 v1(3314,3019) 3344.74,3019 3349.74,3014 3364.75,2998.99 3364.75,2982.85 3365.08,2982.52 3365.08,2965.51 U1.31 ; U1.63 3110.2,3410.94 3110.2,3351.2 v1(3110,3351) ; v1(3311,3180) 3311,3302 v1(3310,3303) 3367.63,3303 3380,3315.37 U1.47@3460.05,3315.37 ; U3.1 3972.62,2408.74 v1(4056.68,2408.74) 4040.68,2408.74 ; U3.13 U3.14 4221.99,2368.43 v1(4241.68,2348.74) ; U7.8 U7.9 U7.10 4247.64,2888.23 v1(4252.64,2893.23) ; U7.1 4256.23,3338.23 v1(4258.11,3340.11) ; v1(4463,3287) 4546.41,3287 U7.19
  Top Layer w25: v1(2483,2574) 2483,2572.65 2485,2570.65 v1(2485,2391)
  Bottom Layer w10: v1(3311,3180) 3311,3019.23 v1@3319,3011.23
  Bottom Layer w25: J3.2 1548,2684 1555,2691 1683,2691 1685,2689 1703,2689
  other v2: 1235,1120 4985,1125 4985,3795 1235,3797
HEARTBEAT: R1.2 U7.18 | length 4628.5
  Top Layer w10: R1.2 3336.35,1823.65 3336.35,1280.32 3564.16,1052.5 4714.59,1052.5 4873,1210.91 4873,3066.88 4701.65,3238.23 U7.18
HEARTBEAT_BUFF: U1.16 U7.2 | length 1459.1
  Top Layer w10: U1.16 3014.92,3041.1 3135.1,3041.1 v1(3141,3047) ; v1(4101,3286) 4102.11,3287.11 4176.52,3287.11 U7.2
  Bottom Layer w10: v1(3141,3047) 3217,2971 3853.43,2971 3915,3032.57 3915,3255 3946,3286 v1(4101,3286)
IM: FL1.2 R17.1 R31.1 U3.10 | length 3826.9
  Top Layer w10: R31.1@3415,1969 3523.43,1860.57 FL1.2 3583.79,1908.79 3594,1919 3899.8,1919 3905.65,1913.14 3905.65,1508.92 3903,1506.26 3903,1332.45 3910.45,1325 4281,1325 4294,1312 4294,1217 4311.5,1199.5 4629.5,1199.5 4681.5,1251.5 4681.5,1427.5 4779,1525 4779,2142 4760,2161 4658,2161 4618,2121 4277,2121 4255,2143 4255,2277.29 4242.61,2289.69 U3.10
IM_Out_Connector: J5.2 PulseTransformer.3 | length 5105.6
  Top Layer w10: v1(1360,1375) 1360,2141.52 1403.87,2185.39 1403.87,2430.79 1375.63,2459.02 1375.63,2793.52 1655.35,3073.25 J5.2 ; v1(3523,1187) 3523,1288.5 PulseTransformer.3
  Bottom Layer w10: v1(1360,1375) 1360,1145.75 1433.25,1072.5 2073.41,1072.5 2121.27,1120.35 2121.27,1343.15 2169.12,1391 2208.88,1391 2271.07,1328.81 2271.07,1134.69 2333.25,1072.5 3408.5,1072.5 v1(3523,1187)
IP: FL1.1 R17.2 R30.2 U3.11 | length 3516.2
  Top Layer w10: FL1.1 3758.43,1860.57 3810,1809 3810,1671 ; R30.2@3869,1675 3865,1671 3810,1671 ; U3.11@4148.7,2309.37 4273,2309.37 4273,2195 4302,2166 4358,2166 4363,2161 4399.65,2197.65 4772.35,2197.65 4801,2169 4801,1512 4699.5,1410.5 4699.5,1238.5 4642.5,1181.5 4293.04,1181.5 4274,1200.54 3815.86,1200.54 3810,1206.4 3810,1671
IP_Out_Connector: J5.1 PulseTransformer.4 | length 5475.7
  Top Layer w10: v1(1320,1390) 1227.13,1482.87 1227.13,3004.56 1372.57,3150 1530,3150 1537.24,3157.24 J5.1 ; v1(3638,1164) 3672.71,1164 3673.71,1163 3717,1163 3727,1173 PulseTransformer.4
  Bottom Layer w10: v1(1320,1390) 1320,1160.3 1425.8,1054.5 2080.87,1054.5 2139.27,1112.9 2139.27,1335.69 2176.57,1373 2201.43,1373 2253.07,1321.36 2253.07,1127.23 2325.8,1054.5 3528.5,1054.5 3633,1159 v1@3639,1159
MISO: R20.1 U1.35 U3.3 | length 1343.3
  Top Layer w10: U1.35 3669.37,3079.96 R20.1@3672.64,3083.23 ; v1(3659,2604) 3678,2623 R20.1 ; U3.3 3972.28,2367.82 4052.18,2367.82 v1(4053.3,2366.7)
  Bottom Layer w10: v1(3659,2604) 3716,2547 3915,2547 3946,2516 3946,2389 3966,2369 4051,2369 v1(4053.3,2366.7)
Net5V_1: 5V.1 R6.1 | length 296.7
  Top Layer w10: 5V.1 5V.1@1750.42,1227.08 ; R6.1@1750.42,1517.92 R6.1
  Top Layer w20: 5V.1@1750.42,1227.08 R6.1@1750.42,1517.92
Net12V_Fused_1: 12V_Fused.1 R7.1 | length 295.1
  Top Layer w10: R7.1@1450,1515 R7.1
  Top Layer w20: R7.1@1450,1515 1453,1512 1453,1231 12V_Fused.1
NetC22_2: C22.2 J2.1 R24.2 R25.1 | length 844.9
  Bottom Layer w10: C22.2 4017.5,1387.5 4017.5,1534.5 R25.1 R24.2 4100,1711 4326,1937 J2.1
NetC24_1: C24.1 J2.4 R26.2 R27.2 | length 767.3
  Bottom Layer w10: C24.1@4573,1363 R26.2 4694,1828 4694,1984 J2.4
NetC27_1: C27.1 R30.1 R31.2 | length 1537.4
  Top Layer w10: C27.1 3173,2193 3251,2193 3264,2180 3264,2041.91 3297.41,2008.5 3409,1896.91 R31.2
  Bottom Layer w10: R31.2 3409,1764 3437,1792 3844,1792 3876,1824 R30.1
NetC28_1: C28.1 R28.1 R29.2 | length 851.2
  Top Layer w10: C28.1 3202.5,2242.5 3225,2220 3441.01,2220 3512,2149.01 3512,1975 R29.2 R28.1
NetCanRX_1: CanRX.1 R3.1 | length 301
  Top Layer w20: R3.1 2644.4,1519.4 2644.4,1350.85 2658.33,1336.92 CanRX.1
NetCanTX_1: CanTX.1 R4.1 | length 298.1
  Top Layer w10: R4.1 R4.1@2351.25,1516.25 ; CanTX.1@2351.25,1228.75 CanTX.1
  Top Layer w20: CanTX.1@2351.25,1228.75 R4.1@2351.25,1516.25
NetF1_1: F1.1 J3.1 | length 521.6
  Top Layer w15: J3.1 1721,2789 1860.85,2928.85 2002.52,2928.85 F1.1
NetFL1_3: FL1.3 PulseTransformer.2 R29.1 | length 203.2
  Top Layer w10: R29.1 3541.18,1674 ; PulseTransformer.2 3541.18,1571.68 3541.18,1674 ; FL1.3 3576.35,1674 3541.18,1674
NetFL1_4: FL1.4 PulseTransformer.1 R28.2 | length 217.2
  Top Layer w10: FL1.4@3677,1678 3706,1678 3711,1678 3727,1678 ; PulseTransformer.1 3727,1678 ; R28.2 3768,1678 3727,1678
NetHRTBT_1: HRTBT.1 R1.1 | length 305.9
  Top Layer w20: R1.1 3240,1375.35 3265.6,1349.75 3265.6,1225.6 HRTBT.1
NetR2_1: R2.1 SHUTDOWN.1 | length 292.3
  Top Layer w20: R2.1@2942.5,1505.12 2937.38,1500 2937.38,1395.22 2959,1373.6 2959,1227.67 SHUTDOWN.1
NetR5_1: R5.1 RESET.1 | length 295.7
  Top Layer w10: R5.1 R5.1@2050.83,1519.17 ; RESET.1@2050.83,1225.83 RESET.1
  Top Layer w20: RESET.1@2050.83,1225.83 R5.1@2050.83,1519.17
NetR16_1: R16.1 U4.1 | length 554.7
  Top Layer w10: U4.1 2074.87,2227.55 v1(2088,2214.41) v1@2088,2209
  Bottom Layer w10: v1@2089,2207.61 2089,2298 2196,2405 R16.1
NetR18_1: R18.1 U3.16 | length 542.4
  Top Layer w10: U3.16 4598.2,2407.8 R18.1
NetR18_2: R18.2 R19.2 U3.15 | length 333.2
  Top Layer w10: U3.15 4322.89,2388.11 R18.2 R19.2
NetR21_2: R21.2 U2.8 | length 211.5
  Top Layer w10: U2.8@4515,2770 4622,2770 4638,2754 4712.49,2754 4714.49,2752 R21.2
NetU1_17: U1.17 | length 164.4
  Top Layer w10: v3@3089,2828 3090,2827 v3(3090,2814.5) U1.17
NetU1_20: U1.20 | length 154.7
  Top Layer w10: U1.20 3149.57,2964.49 3149.57,2931.34 3170,2910.91 v3@3170,2819
  other v3: 3170,2814.5
NetU1_33: U1.33 U3.5 | length 1074.7
  Top Layer w10: U1.33 3518.41,3040.59 3613,2946 3613,2486.12 3702.87,2396.25 3763,2396.25 3829.84,2329.4 U3.5@3971.61,2329.4
NetU1_34: U1.34 U3.4 | length 1083.4
  Top Layer w10: U1.34 3534.72,3060.28 3631,2964 3631,2493.57 3710.32,2414.25 3771.32,2414.25 3836.49,2349.09 U3.4@3974.15,2349.09
NetU1_36: U1.36 U3.2 | length 1325.6
  Top Layer w10: U1.36 3460.35,3099.13 3417.13,3099.13 3404,3086 3404,3038 3438.5,3003.5 3530.04,3003.5 3594.5,2939.04 3594.5,2479.16 3663,2410.66 v1(3663,2336) ; v1(3817.68,2413) 3818.42,2413 3821.5,2409.91 3885.93,2409.91 3907.73,2388.11 U3.2
  Bottom Layer w10: v1(3663,2336) 3663,2338.25 3737.75,2413 v1(3817.68,2413)
RESET: J1.10 U1.7 U4.2 U7.6 | length 3702.1
  Top Layer w10: U4.2 2443.55,2306 2497.81,2306 2506.12,2306 2512,2311.88 2512,2552 2578,2618 2923,2618 2936,2631 v1(2936,2720) ; U1.7 3102.17,3217.76 v1(3102.64,3218.23) ; v1(3841,3001) 3980.41,3001 4067.64,3088.23 U7.6
  Bottom Layer w10: v1@2935,2720 2935,3192 2961.23,3218.23 v1(3102.64,3218.23) 3462.64,3218.23 3678.87,3002 3802.85,3002 ; v1(3841,3001) 3840,3002 3802.85,3002 ; J1.10 3925,3703 3946.45,3681.55 3946.45,3549.96 3940.59,3544.1 3808.71,3544.1 3802.85,3538.24 3802.85,3002
RESET_FromBuff: R5.2 U7.14 | length 5298.7
  Top Layer w10: v1(4374,1111) 4375,1112 4723.18,1112 4837,1225.82 4837,3024 4822.77,3038.23 U7.14
  Bottom Layer w10: R5.2 2360,1610 3273,1610 3814,1069 4307,1069 4350,1112 4373,1112 v1(4374,1111)
SHUTDOWN: J3.7 R2.2 U7.17 | length 7866.2
  Top Layer w10: R2.2 2890,1867.5 2890,1122.42 2977.92,1034.5 4722.04,1034.5 4891,1203.46 4891,3074.34 4703.11,3262.23 4503.25,3262.23 4495.64,3254.61 4495.64,3194.28 4499.5,3190.43 4545.44,3190.43 U7.17
  Bottom Layer w10: J3.7 1447,2588 1369.52,2588 1363,2581.48 1363,2469 1417,2415 1986.16,2415 2013.82,2442.65 2339.18,2442.65 2347.21,2434.63 2509.63,2434.63 2615,2540 2936.64,2540 2942.5,2534.14 R2.2
SHUTDOWN_BUFF: U1.23 U7.3 | length 1414.4
  Top Layer w10: U1.23 3208.11,2887.89 v1(3240,2856) ; v1(4055,3235) 4056.61,3236.61 4176.02,3236.61 U7.3
  Bottom Layer w10: v1(3240,2856) 3240,2945.14 3245.86,2951 3916.6,2951 3933,2967.4 3933,3210.84 3958.82,3236.65 4053.35,3236.65 v1(4055,3235)
SWCLK: J1.4 R11.2 U1.49 | length 610.9
  Top Layer w10: R11.2 3370,3555.99 3385.28,3540.71 U1.49
  Bottom Layer w10: R11.2 3545.5,3740.5 3696.53,3740.5 3731,3706.03 J1.4
SWDIO: J1.2 R8.1 U1.46 | length 845.8
  Top Layer w10: U1.46 3624.37,3296.5 3672.84,3248.03 3672.84,3192.55 R8.1@3674.44,3190.94
  Bottom Layer w10: R8.1 3675.54,3200 3651.35,3224.19 3650.81,3224.19 3621,3254 3621,3646.03 3677.97,3703 J1.2
VCC_3.3V: C4.2 C5.2 C12.2 C13.2 C14.2 C15.2 C16.2 C19.2 C26.2 J1.1 Q1.1 R8.2 R20.2 U1.13 U1.19 U1.32 U1.48 U1.64 U2.5 U3.6 U5.2 | length 8954.4
  Top Layer w10: v3@1924.05,3143.7 1925,3144.65 1925,3250 ; Q1.1 1925,3250 ; U5.2 2298.35,3223.35 1951.65,3223.35 1925,3250 ; C12.2 C12.2@2761.73,3099.13 ; 2953,3099.13 2953.51,3099.65 U1.13 3185.23,3099.65 3192,3106.41 v1@3192,3109.79 ; U1.64 U1.64@3090.51,3411.97 ; C13.2@3090.51,3606.1 C13.2 ; C15.2 3130,2720.59 3130,2898 v1(3128,2900) ; v1@3128.2,2900 3128.2,2963.83 U1.19 ; U1.32 3384.76,2964.49 3384.76,2726.1 C16.2 ; U1.48 U1.48@3461.38,3336.38 ; C14.2@3678.77,3338.23 C14.2 C14.2@3679.82,3340.41 ; C5.2@3679.82,3470.82 C5.2 ; U3.6 4038.39,2309.37 4087.94,2358.92 4087.94,2436.49 4081.43,2443 3777.25,2443 C19.2 3801.75,2538 4178.54,2538 4205.2,2511.34 4473.66,2511.34 U2.5@4515,2470 ; R8.2@3972,3202 R8.2
  Top Layer w15: U5.2 2458,3265 2478,3245 ; C4.2@2555,3245 2478,3245 ; C4.2 2696.77,3103.23 C12.2 ; C12.2@2761.73,3099.13 2953,3099.13 2953,3401.21 2961.79,3410 U1.64@3086.85,3410 ; U1.64@3090.51,3411.97 C13.2@3090.51,3606.1 ; v1@3192,3109.79 3192,3258.96 3268.9,3335.87 U1.48 ; v1(3196.39,3105.39) 3200.79,3101 3291.73,3101 3385.25,3007.48 U1.32@3385.25,2986.44 ; v1(3330,2408) v1@3330,2410 ; U1.48@3461.38,3336.38 C14.2@3655.79,3336.38 ; v1(3648,2154.5) 3648,2157.53 3567.53,2238 3489,2238 3436,2291 3436,2401.21 3427.21,2410 v1@3330,2410 ; C14.2@3678.77,3338.23 3815,3202 R8.2@3972,3202 ; C14.2@3679.82,3340.41 C5.2@3679.82,3470.82 ; 2478,3245 2478,3045.79 2486.79,3037 2906,3037 3011.5,2931.5 3011.5,2505.67 3107.17,2410 v1@3330,2410
  Bottom Layer w10: v1(3128,2900) 3107,2921 3107,3055.43 3158.57,3107 v1@3192,3107 ; C16.2 3395.52,2721.11 3705.11,2721.11 v1(3708,2724) ; C5.2@3679.82,3470.82 C5.2 3681.5,3473.5 3681.5,3652.5 J1.1 ; R20.2 R20.2@3973.5,3077.5 ; R8.2@3973.5,3199.5 R8.2
  Bottom Layer w15: v1(3330,2408) 3332.87,2405.13 3332.87,2300.13 C26.2 ; v1(3648,2154.5) 3647.5,2154.5 3630.5,2171.5 3630.5,2429.54 3690.59,2489.63 3730.62,2489.63 C19.2 ; R20.2@3973.5,3077.5 R8.2@3973.5,3199.5
  other v3: 1924.53,3144.18
VCC_5V: C2.2 C17.2 C18.2 C20.2 C21.2 J2.2 R6.2 R16.2 U2.3 U3.7 U3.8 U3.9 U3.12 U6.3 U7.20 | length 14282.8
  Top Layer w10: R6.2 1888.5,2056 2158,2056 ; R16.2 2125,2408 2129.69,2403.31 2152.14,2403.31 2158,2397.45 2158,2056 ; v1(2135,3885) 3270,3885 3350,3805 v1(4745,3805) ; v1(2189,1343) 2189,1377 2162,1404 2162,2056 2158,2056 ; C2.2@2628.64,2713.23 C2.2@2633.64,2718.23 ; C18.2 3795.31,2289.69 3971.22,2289.69 U3.7@3972,2290.46 ; C20.2@3742,2627 C20.2@3768.36,2627 ; U3.8 U3.7 v1(4064.82,2289.69) ; U3.9 4084.5,2270 v1(4064.82,2289.69) ; U3.12 4138.65,2328.71 4099.12,2328.71 4064.82,2294.41 v1(4064.82,2289.69) ; U7.20 C17.2
  Top Layer w15: R16.2@2125,2408 2126,2409 2126,2648 2135,2657 U6.3 2488,2657 2517,2686 ; C2.2 2635,2686 2517,2686 ; v1(3661,2506) 3661,2532.5 C20.2 4161.5,2613.5 U2.3@4205,2570 ; v1(3674,2122) 3673.5,2121.5 3634.54,2121.5 3548.04,2208 3482,2208 3409,2281 3409,2370.95 3400.21,2379.74 3046.08,2379.74 3010.89,2379.74 2986,2404.63 2986,2715.96 2949.46,2752.5 2583.5,2752.5 2517,2686
  Bottom Layer w10: v1(2135,3885) 2135,2760 2245,2650 2403,2650 U6.3 ; v1(2189,1343) 2189,1053 2213,1029 4389,1029 4419,1059 4419,1135.14 4413.14,1141 C21.2 ; C17.2 4734,3341.87 4741,3348.87 4740,3349.87 4745,3354.87 v1(4745,3805)
  Bottom Layer w15: v1(3661,2506) 3607.5,2452.5 3607.5,2149.04 3634.54,2122 v1(3674,2122) 3742,2190 3742,2207.03 ; C18.2 3742,2207.03 ; J2.2 4426,2112.21 4417.21,2121 4134.51,2121 4048.49,2207.03 3742,2207.03
pads on no net: J1.6 J1.7 J1.8 J3. J5. U1.1 U1.2 U1.3 U1.4 U1.5 U1.6 U1.8 U1.9 U1.10 U1.11 U1.21 U1.24 U1.25 U1.26 U1.27 U1.28 U1.29 U1.30 U1.37 U1.38 U1.39 U1.40 U1.43 U1.50 U1.51 U1.52 U1.53 U1.54 U1.55 U1.56 U1.57 U1.58 U1.59 U1.60 U1.61 U1.62 U4.3 U7.11 U7.12

## Polygon pours and split planes (outlines as drawn)
GND on Bottom Layer "Bottom Layer-GND" (solid, remove dead copper, pour order 0): 1100,1064.61 1180.41,985 5031,985 5120,1074 5120,3843 5033,3930 1200,3930 1099,3831

## Silkscreen, mask and mechanical layers (free items; w line width, h text height)
Top Overlay:
  drawing of 15 lines, arcs and shapes, not listed
  text "Masterboard RevB" at 4090,3515 h75
  text "3.3V TP" at 1694.05,3093.35 h30
  text "12V TP" at 1797.5,2932.15 h30
  text "GND" at 4107.97,2666.4 h30
  text "5V" at 2470.55,2651.45 h30
  text "5V" at 4133.2,2570.95 h30
  text "3.3V" at 4573.5,2467.25 h30
  text "5V" at 2031.9,2374.75 h30
BOARD:
  lines w10: 1073,1053 1073,3867 1165,3959 4999,3959 5053,3959 5147,3865 5147,1053.58 5052.42,959 1167,959 1073,1053

## Text inside footprints (layer, text, board x,y; h text height)
J1: Top Overlay "10" at 3966,3693 h50; Top Overlay "9" at 3974,3598 h50; Top Overlay "2" at 3574.98,3685.01 h50; Top Overlay "1" at 3574.98,3620.99 h50; Mechanical 13 "2" at 3574.98,3685.01 h50; Mechanical 13 "1" at 3574.98,3620.99 h50